# EAGLE board Reflow Control Board Rev 2 (EAGLE 6.5.0)
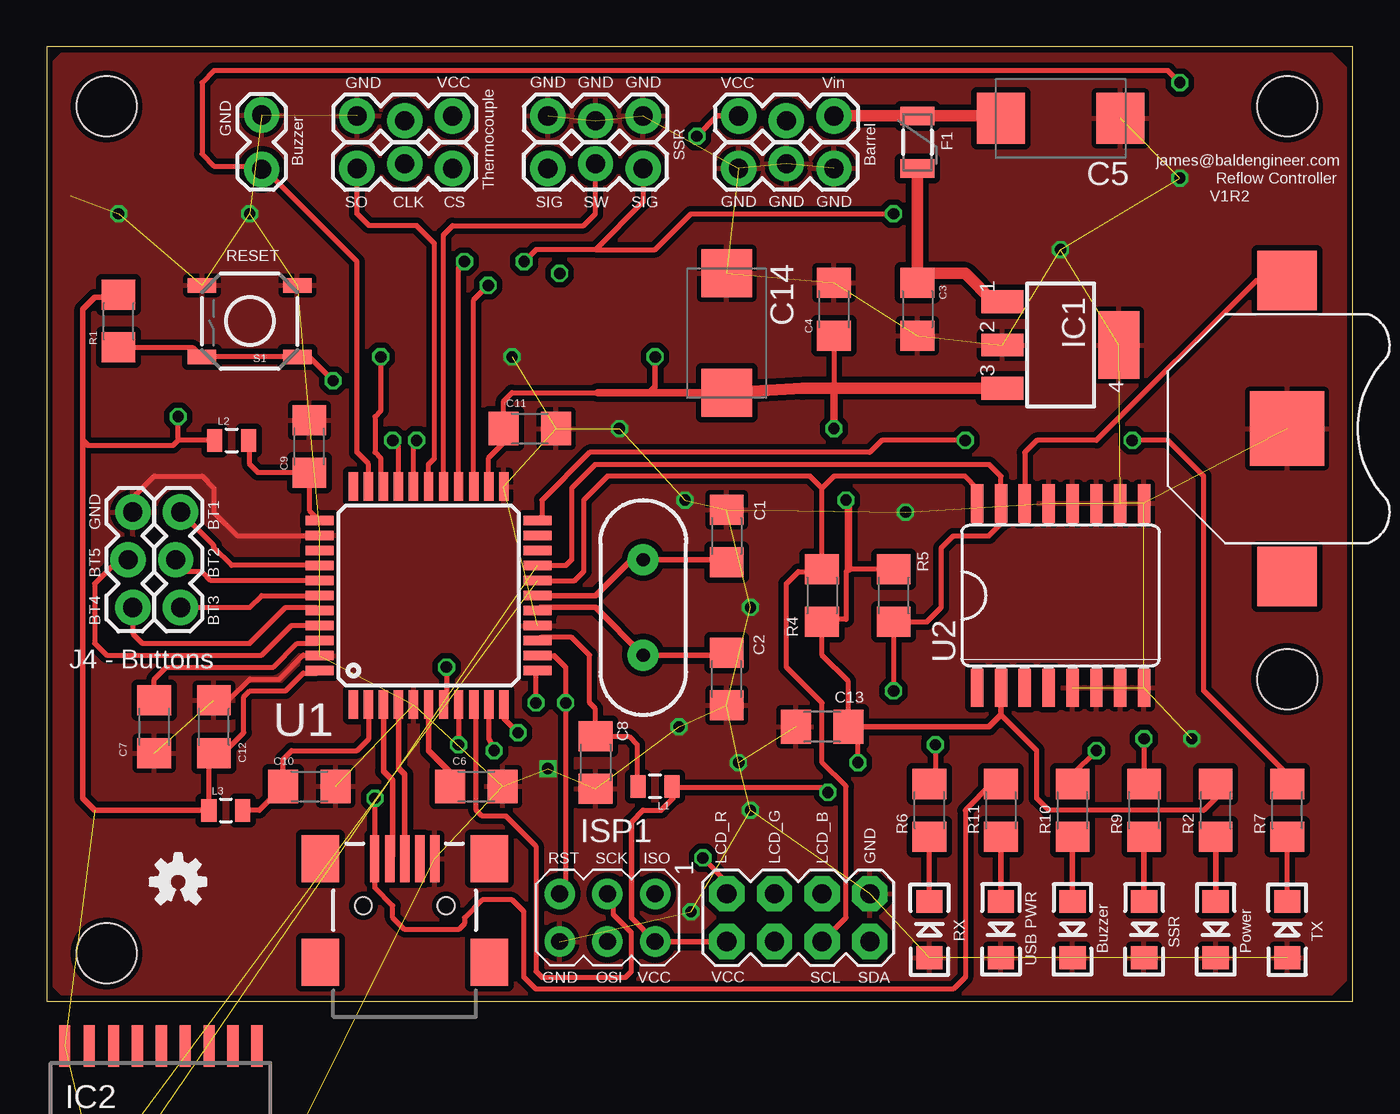
[diagram p0: board, top side]
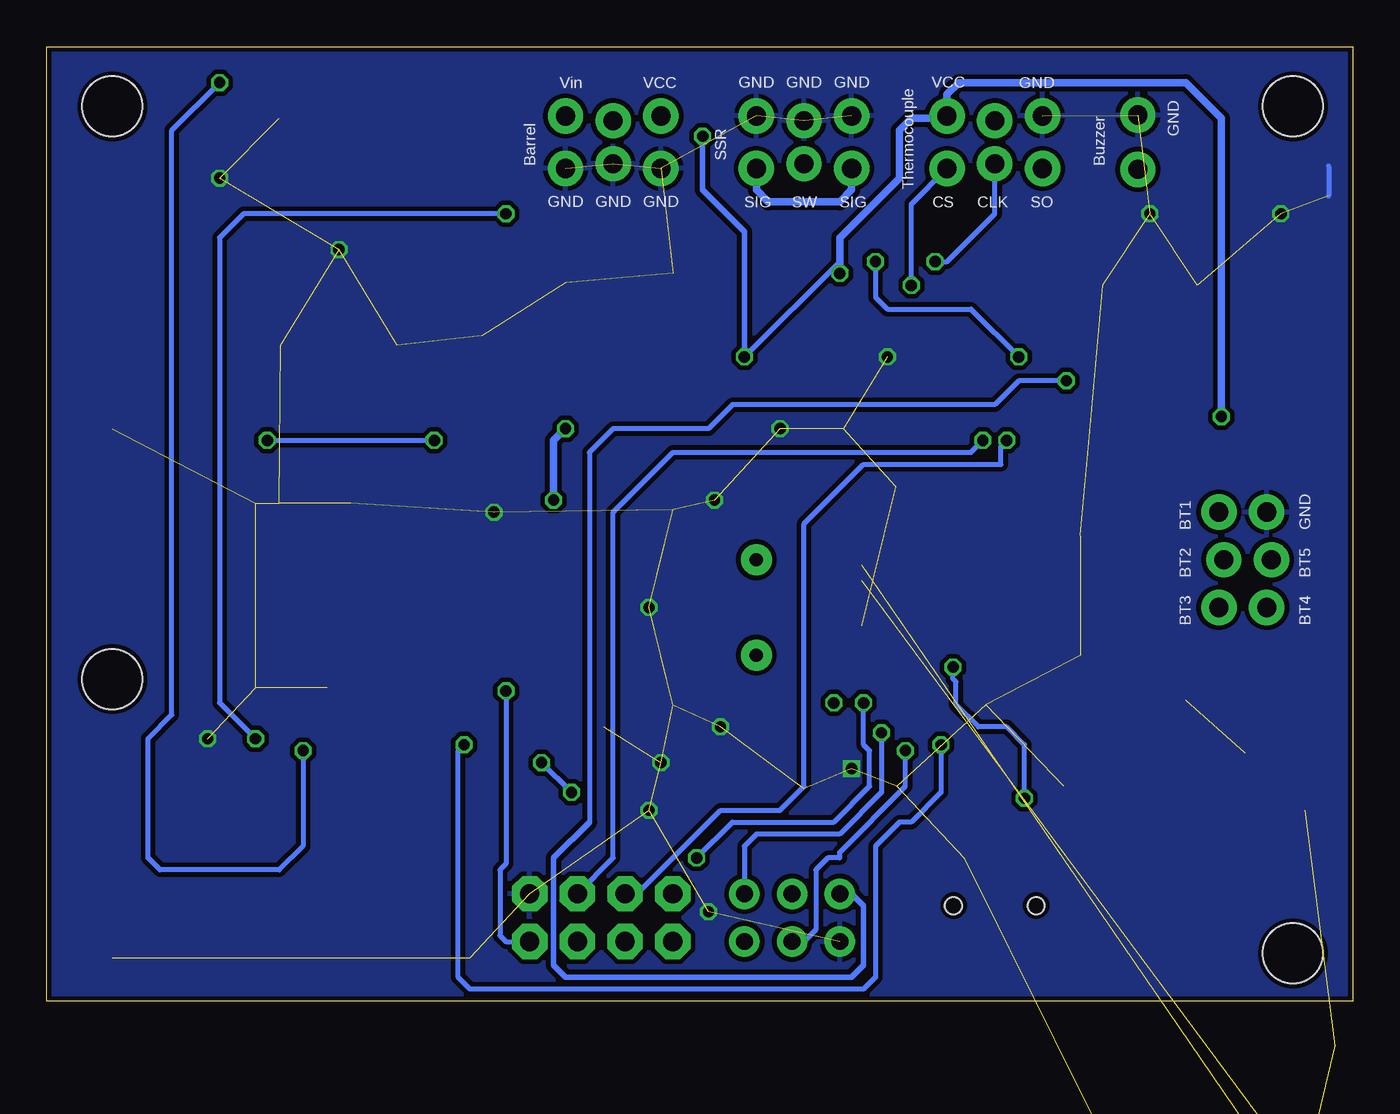
[diagram p1: board, bottom side, seen from below]

Size 69.52 x 50.79 mm. Coordinates in mm from the lower left corner, seen from the top.
Outline: 0,0 69.52,0 69.52,50.79 0,50.79 0,0
Copper layers (1*16): Top 0.035mm / dielectric 1.5mm / Bottom 0.035mm
Design rules "Fusion_eagle_rule_v1.1": minimum track width 6mil, minimum drill 12mil, track to track 6mil, track to pad 6mil, pad to pad 6mil, via to via 6mil, smd to smd 0mil, copper to edge 10mil, drill to drill 10mil, minimum pad ring 10mil, minimum via ring 6mil, stop-mask expansion 2mil, vias tented up to drill 100mil, thermal gap 10mil
Holes 3.2 mm at 3.17,47.62 3.17,2.54 66.04,17.14 66.04,47.62

## Footprints (pad centres in the part's own frame; a part is rotated, then mirrored left to right if it is on the bottom)
BATTCON_12MM = smd 3.962 x 3.962: GND 0,0 | smd 3.175 x 3.175: PWR@1 7.874,0; PWR@2 -7.874,0
LED-1206 = smd 1.2 x 1.4: A -1.5,0; C 1.5,0
1206 = smd 1.6 x 1.8: 1 -1.4,0; 2 1.4,0
D/7343-31R = smd 2.55 x 2.7: + 3.175,0; - -3.175,0
PTC-1206 = smd 1 x 1.8: 1 -1.4,0; 2 1.4,0
SOT223 = smd 1.219 x 2.235: 1 -2.311,-3.099; 2 0,-3.099; 3 2.311,-3.099 | smd 3.6 x 2.2: 4 0,3.099
SO18W = smd 0.6 x 2.2: 1 -4.445,-4.6; 2 -3.175,-4.6; 3 -1.905,-4.6; 4 -0.635,-4.6; 5 0.635,-4.6; 6 1.905,-4.6; 7 3.175,-4.6; 8 4.445,-4.6; 9 5.715,-4.6; 10 5.775,4.6; 11 4.505,4.6; 12 3.235,4.6; 13 1.965,4.6; 14 0.695,4.6; 15 -0.575,4.6; 16 -1.845,4.6; 17 -3.145,4.6; 18 -4.445,4.6
AVRISP = drill 0.9 pad 1.626: 1 -1.27,2.54; 2 1.27,2.54; 3 -1.27,0; 4 1.27,0; 5 -1.27,-2.54; 6 1.27,-2.54
1X03_LOCK = drill 1.016 pad 1.88: 1 0,0.127; 2 2.54,-0.127; 3 5.08,0.127
2X4 = drill 1.016 pad 1.88 octagon: 1 -3.81,-1.27; 2 -3.81,1.27; 3 -1.27,-1.27; 4 -1.27,1.27; 5 1.27,-1.27; 6 1.27,1.27; 7 3.81,-1.27; 8 3.81,1.27
1X02_LOCK = drill 1.016 pad 1.88: 1 -0.178,0; 2 2.718,0
0805 = smd 0.8 x 1.2: 1 -0.9,0; 2 0.9,0
TACTILE_SWITCH_SMD = smd 1.524 x 0.762: 1 -2.54,1.905; 2 2.54,1.905; 3 -2.54,-1.905; 4 2.54,-1.905
TQFP44 = smd 1.5 x 0.5: 1 -5.8,4; 2 -5.8,3.2; 3 -5.8,2.4; 4 -5.8,1.6; 5 -5.8,0.8; 6 -5.8,0; 7 -5.8,-0.8; 8 -5.8,-1.6; 9 -5.8,-2.4; 10 -5.8,-3.2; 11 -5.8,-4; 23 5.8,-4; 24 5.8,-3.2; 25 5.8,-2.4; 26 5.8,-1.6; 27 5.8,-0.8; 28 5.8,0; 29 5.8,0.8; 30 5.8,1.6; 31 5.8,2.4; 32 5.8,3.2; 33 5.8,4 | smd 0.5 x 1.5: 12 -4,-5.8; 13 -3.2,-5.8; 14 -2.4,-5.8; 15 -1.6,-5.8; 16 -0.8,-5.8; 17 0,-5.8; 18 0.8,-5.8; 19 1.6,-5.8; 20 2.4,-5.8; 21 3.2,-5.8; 22 4,-5.8; 34 4,5.8; 35 3.2,5.8; 36 2.4,5.8; 37 1.6,5.8; 38 0.8,5.8; 39 0,5.8; 40 -0.8,5.8; 41 -1.6,5.8; 42 -2.4,5.8; 43 -3.2,5.8; 44 -4,5.8
SO16L = smd 0.66 x 2.032: 1 -4.445,-4.902; 2 -3.175,-4.902; 3 -1.905,-4.902; 4 -0.635,-4.902; 5 0.635,-4.902; 6 1.905,-4.902; 7 3.175,-4.902; 8 4.445,-4.902; 9 4.445,4.902; 10 3.175,4.902; 11 1.905,4.902; 12 0.635,4.902; 13 -0.635,4.902; 14 -1.905,4.902; 15 -3.175,4.902; 16 -4.445,4.902
USB-MINIB = smd 2.5 x 0.5: D+ 2.5,0; D- 2.5,0.8; GND 2.5,-1.6; ID 2.5,-0.8; VBUS 2.5,1.6 | smd 2.5 x 2: MTN1 -3,4.5; MTN2 2.5,4.5; MTN3 -3,-4.5; MTN4 2.5,-4.5 | hole 0.9: 0,2.2; 0,-2.2
HC49US = drill 0.7 pad 1.651: 1 -2.54,0; 2 2.54,0

## Placement (x,y rotation side)
BAT1  [BATTCON_12MM]  66.04,30.48 270 top
BUZZ_IND  [LED-1206]  54.61,3.81 270 top
C1  22p  [1206]  36.2,24.77 270 top
C2  22p  [1206]  36.2,17.14 90 top
C3  0.33uF  [1206]  46.35,36.83 270 top
C4  0.1uF  [1206]  41.91,36.83 90 top
C5  47u  [D/7343-31R]  53.98,46.99 180 top
C6  1u  [1206]  22.86,11.43 0 top
C7  100n  [1206]  5.71,14.61 90 top
C8  100n  [1206]  29.21,12.7 270 top
C9  100n  [1206]  13.97,29.53 90 top
C10  100n  [1206]  13.97,11.43 0 top
C11  100n  [1206]  25.72,30.48 0 top
C12  100n  [1206]  8.89,14.61 90 top
C13  100n  [1206]  41.27,14.61 180 top
C14  10u  [D/7343-31R]  36.2,35.56 270 top
F1  PTCSMD  [PTC-1206]  46.35,45.72 270 top
IC1  UA78M05DCY  [SOT223]  53.98,34.92 270 top
IC2  MCP2300X/SO  [SO18W]  5.4,-6.99 0 top
ISP1  AVRISP-6  [AVRISP]  29.84,4.45 270 top
JP1A  [1X03_LOCK]  36.83,46.99 0 top
JP1B  [1X03_LOCK]  41.91,44.45 180 top
JP2  M04X2  [2X4]  40.01,4.45 0 top
JP3A  [1X03_LOCK]  21.59,44.45 180 top
JP3B  [1X03_LOCK]  16.51,46.99 0 top
JP4A  [1X03_LOCK]  6.99,26.04 270 top
JP4B  [1X03_LOCK]  4.45,26.04 270 top
JP5  [1X02_LOCK]  11.43,46.99 270 top
JP6A  [1X03_LOCK]  31.75,44.45 180 top
JP6B  [1X03_LOCK]  26.67,46.99 0 top
L1  [0805]  32.38,11.43 180 top
L2  [0805]  9.84,29.84 0 top
L3  [0805]  9.53,10.16 0 top
PWR_IND  [LED-1206]  62.23,3.81 270 top
R1  10k  [1206]  3.81,36.2 90 top
R2  1k  [1206]  62.23,10.16 90 top
R3  4.7k  [1206]  2.54,-14.92 0 top  (outside the outline)
R4  4k7  [1206]  41.27,21.59 270 top
R5  4k7  [1206]  45.09,21.59 90 top
R6  1k  [1206]  46.99,10.16 90 top
R7  1k  [1206]  66.04,10.16 90 top
R8  4.7k  [1206]  2.54,-17.78 0 top  (outside the outline)
R9  1k  [1206]  58.42,10.16 90 top
R10  1k  [1206]  54.61,10.16 90 top
R11  1k  [1206]  50.8,10.16 90 top
R12  [1206]  2.54,-20.64 0 top  (outside the outline)
R13  [1206]  2.54,-23.5 0 top  (outside the outline)
R14  [1206]  2.54,-26.35 0 top  (outside the outline)
R15  10k  [1206]  2.54,-29.21 0 top  (outside the outline)
RX_IND  [LED-1206]  46.99,3.81 90 top
S1  [TACTILE_SWITCH_SMD]  10.79,36.2 180 top
SSR_IND  [LED-1206]  58.42,3.81 270 top
TX_IND  [LED-1206]  66.04,3.81 90 top
U1  ATMEGA32U4-AU  [TQFP44]  20.32,21.59 90 top
U2  DS3231  [SO16L]  53.98,21.59 0 top
U$3  USB-MINIB-5PIN  [USB-MINIB]  19.05,5.08 90 top
U$4  OSHW-LOGOS  [OSHW-LOGO-S]  6.99,6.35 0 top
USB_PWR_IND  [LED-1206]  50.8,3.81 270 top
Y1  [HC49US]  31.75,20.95 90 top

## Library data of the parts
BAT1 BUZZ_IND C1-C4 C6-C13 L1-L3 PWR_IND R1-R15 RX_IND S1 SSR_IND TX_IND U2 U$4 USB_PWR_IND = Add-Ohms
C5 C14 = rcl
F1 JP1A JP1B JP2 JP3A JP3B JP4A JP4B JP5 JP6A JP6B U$3 Y1 = SparkFun
IC1 = linear
IC2 ISP1 U1 = adafruit

## Nets
A0: U1.36
BT1: JP4A.1 U1.37
BT2: JP4A.2 U1.38
BT3: JP4A.3 U1.39
BT4: JP4B.3 U1.40
BT5: JP4B.2 U1.41
BUZZ_SIG: JP5.2 R10.2 U1.32
D0: U1.20
D1: U1.21
GND: BAT1.GND BUZZ_IND.C C1.1 C2.1 C3.2 C4.2 C5.- C6.2 C7.1 C8.2 C9.2 C10.2 C11.2 C12.2 C13.2 C14.- IC1.2 IC1.4 IC2.9 ISP1.6 JP1B.1 JP1B.2 JP1B.3 JP2.8 JP3B.1 JP4B.1 JP5.1 JP6B.1 JP6B.2 JP6B.3 PWR_IND.C R12.1 R13.1 R14.1 RX_IND.A S1.3 S1.4 SSR_IND.C TX_IND.A U1.5 U1.15 U1.23 U1.35 U1.43 U2.5 U2.6 U2.7 U2.8 U2.9 U2.10 U2.11 U2.12 U2.13 U$3.GND USB_PWR_IND.C
I2C_SCL: IC2.1 JP2.5 R4.1 R8.1 U1.18 U2.16
I2C_SDA: IC2.2 JP2.7 R3.1 R5.1 U1.19 U2.15
JACK_IN: C5.+ F1.1 JP1A.3
LCD_B: JP2.6 U1.29
LCD_G: JP2.4 U1.30
LCD_R: JP2.2 U1.12
MISO: ISP1.1 U1.11
MOSI: ISP1.4 U1.10
N$1: C1.2 U1.17 Y1.2
N$2: C2.2 U1.16 Y1.1
N$3: R7.1 TX_IND.C
N$4: C6.1 U1.6
N$5: C7.2 U1.42
N$6: PWR_IND.A R2.1
N$7: R6.1 RX_IND.C
N$8: R9.1 SSR_IND.A
N$9: U1.1
N$10: U1.33
N$12: BAT1.PWR@2 U2.14
N$13: IC2.3 R12.2
N$14: BUZZ_IND.A R10.1
N$15: R11.1 USB_PWR_IND.A
N$17: IC2.4 R13.2
N$18: IC2.5 R14.2
N$20: IC2.6 R15.1
RESET: ISP1.5 R1.1 S1.1 S1.2 U1.13
RXLED: R6.2 U1.8
SCK: ISP1.3 U1.9
SSR_SIG: JP6A.1 JP6A.3 R9.2 U1.31
SSR_SW: JP6A.2 U1.27
THERM_CLK: JP3A.2 U1.26
THERM_CS: JP3A.1 U1.25
THERM_S0: JP3A.3 U1.28
TXLED: R7.2 U1.22
USB+: U1.4 U$3.D+
USB-: U1.3 U$3.D-
UVCC: C10.1 L3.2 U1.2
VCC: C4.1 C11.1 C12.1 C13.1 C14.+ IC1.3 IC2.18 ISP1.2 JP1A.1 JP2.1 JP3B.3 L1.1 L2.1 L3.1 R1.2 R2.2 R3.2 R4.2 R5.2 R8.2 R15.2 U1.24 U1.44 U2.2
VCC0: C8.1 L1.2 U1.14
VCC1: C9.1 L2.2 U1.34
VIN: C3.1 F1.2 IC1.1
VUSB: R11.2 U1.7 U$3.VBUS

## Tracks (layer width: path | path; a pad name or v marks a point on that pad's centre or on a via)
BT1
  Top 0.254: U1.37 9.83,23.19 8.89,24.13 8.89,24.26 JP4A.1
BT2
  Top 0.254: U1.38 8.72,22.39 8.26,22.86 7.49,22.86 JP4A.2
BT3
  Top 0.254: JP4A.3 10.79,20.95 11.43,21.59 U1.39
BT4
  Top 0.254: JP4B.3 4.57,19.56 5.08,19.05 10.79,19.05 12.7,20.95 14.36,20.95 U1.40
BT5
  Top 0.254: JP4B.2 3.81,23.5 2.54,22.23 2.54,19.05 3.17,18.41 11.43,18.41 13.02,20 14.51,20 U1.41
BUZZ_SIG  (via drill 0.6)
  Top 0.254: U1.32 17.12,28.6 16.51,29.21 16.51,39.37 12.06,43.81 11.89,43.81 JP5.2 11.25,44.45 8.89,44.45 8.26,45.09 8.26,48.9 8.89,49.53 59.69,49.53 v60.33,48.9 | R10.2 54.61,12.06 v55.88,13.34
  Bottom 0.254: v55.88,13.34 55.88,8.26 57.15,6.99 63.5,6.99 64.14,7.62 64.14,13.97 62.87,15.24 62.87,46.35 v60.33,48.9
GND  (via drill 0.6)  (68 unrouted)
  Top 0.254: JP4B.1 4.57,26.8 5.71,27.94 8.26,27.94 8.89,27.3 8.89,26.04 10.16,24.77 14.49,24.77 U1.35 | C12.2 9.65,16 10.79,17.14 12.38,17.14 13.65,18.41 14.49,18.41 U1.43
  Bottom 0.254: 1.27,44.45 1.27,42.86
  other vias: 3.81,41.91 10.79,41.91 60.33,43.81 53.98,40.01 45.72,26.04 60.96,13.97 24.77,34.29 37.47,20.95 33.97,26.67 33.66,14.61 36.83,12.7 30.48,30.48 37.47,10.16 34.29,4.76 26.67,12.38
  pour Bottom (isolate 0.254): 0,50.8 69.22,50.8 69.22,0 0,0
  pour Top (isolate 0.305): 1.27,50.8 67.94,50.8 69.22,49.53 69.22,1.27 67.94,0 1.27,0 0,1.27 0,49.53
I2C_SCL  (2 unrouted)
  Top 0.254: 41.27,27.3 R4.1 41.15,22.86 40.01,22.86 39.37,22.23 39.37,17.78 41.27,15.88 41.27,12.7 42.55,11.43 42.55,4.45 JP2.5 | 41.27,27.3 40.64,27.94 29.84,27.94 28.57,26.67 28.57,22.86 28.11,22.39 U1.18 | U2.16 49.53,27.3 48.9,27.94 41.91,27.94 41.27,27.3
I2C_SDA  (via drill 0.6)  (2 unrouted)
  Top 0.254: U1.19 26.13,23.18 27.62,23.18 27.94,23.5 27.94,27.3 29.21,28.57 50.16,28.57 50.8,27.94 U2.15 50.8,25.4 50.16,24.77 48.26,24.77 47.62,24.13 47.62,20.95 46.86,20.19 R5.1 | R5.1 45.09,20.32 | R5.1 v45.09,16.51
  Bottom 0.254: v45.09,16.51 45.09,7.3 45.4,6.99 45.4,3.49 45.09,3.17 JP2.7
JACK_IN
  Top 0.61: JP1A.3 F1.1 50.67,47.12 C5.+
LCD_B  (via drill 0.6)
  Top 0.254: U1.29 19.52,29.68 v19.68,29.84
  Bottom 0.254: JP2.6 39.37,7.62 39.37,26.04 36.2,29.21 20.32,29.21 v19.68,29.84
LCD_G  (via drill 0.6)
  Top 0.254: U1.30 18.72,29.54 v18.41,29.84
  Bottom 0.254: JP2.4 38.1,5.71 33.66,10.16 30.48,10.16 29.21,11.43 29.21,25.4 26.04,28.57 18.72,28.57 18.72,29.54 v18.41,29.84
LCD_R  (via drill 0.6)
  Top 0.254: JP2.2 36.2,6.35 v34.92,7.62 | v26.04,15.88 26.04,17.5 U1.12
  Bottom 0.254: v34.92,7.62 33.02,9.53 27.62,9.53 25.72,11.43 25.72,13.34 26.04,13.65 v26.04,15.88
MISO  (via drill 0.6)
  Top 0.254: U1.11 24.32,15.05 v25.08,14.29
  Bottom 0.254: v25.08,14.29 25.08,11.11 27.3,8.89 31.75,8.89 32.38,8.26 ISP1.1
MOSI  (via drill 0.6)
  Top 0.254: U1.10 23.52,13.99 v23.81,13.34
  Bottom 0.254: ISP1.4 29.21,3.17 28.57,3.81 28.57,6.99 27.94,7.62 27.3,7.62 27.3,7.94 23.81,11.43 v23.81,13.34
N$1
  Top 0.305: U1.17 29.21,21.59 31.11,23.5 Y1.2 36.06,23.5 C1.2
N$2
  Top 0.305: U1.16 26.29,20.95 29.21,20.95 Y1.1 36.06,18.41 C2.2
N$3
  Top 0.254: TX_IND.C R7.1
N$4
  Top 0.305: C6.1 21.46,12.2 20.32,13.34 U1.6
N$5
  Top 0.254: C7.2 5.71,17.14 6.35,17.78 12.06,17.78 13.34,19.05 14.38,19.05 U1.42
N$6
  Top 0.305: R2.1 PWR_IND.A
N$7
  Top 0.254: RX_IND.C R6.1
N$8
  Top 0.305: R9.1 SSR_IND.A
N$12
  Top 0.254: BAT1.PWR@2 64.39,38.35 55.88,29.84 52.7,29.84 52.07,29.21 U2.14
N$13  (1 unrouted)
N$14
  Top 0.305: R10.1 BUZZ_IND.A
N$15
  Top 0.305: R11.1 USB_PWR_IND.A
N$17  (1 unrouted)
N$18  (1 unrouted)
N$20  (1 unrouted)
RESET  (via drill 0.6)
  Top 0.254: U1.13 27.01,18.39 27.62,17.78 v27.62,15.88 27.62,6.03 ISP1.5 | R1.1 7.75,34.8 S1.2 S1.1 13.97,34.29 v15.24,33.02
  Bottom 0.254: v15.24,33.02 17.78,33.02 19.05,31.75 33.02,31.75 34.29,30.48 39.37,30.48 40.64,29.21 40.64,9.53
  Bottom 0.305: 40.64,9.53 42.55,7.62 42.55,1.91 41.91,1.27 26.67,1.27 26.04,1.91 26.04,5.08 26.67,5.71 ISP1.5
RXLED  (via drill 0.6)
  Top 0.254: U1.8 21.92,13.66 v21.91,13.65 | v47.31,13.65 47.31,11.88 R6.2
  Bottom 0.254: v21.91,13.65 21.91,11.11 23.5,9.53 24.13,9.53 25.4,8.26 25.4,1.27 26.04,0.64 46.99,0.64 47.62,1.27 47.62,13.34 v47.31,13.65
SCK
  Top 0.254: U1.9 22.86,15.65 22.86,10.16 23.18,9.84 24.45,9.84 26.04,8.26 26.04,1.59 26.35,1.27 30.8,1.27 31.11,1.59 31.11,3.65 30.16,4.6 30.16,5.4 ISP1.3
SSR_SIG  (via drill 0.6)
  Top 0.254: JP6A.1 31.75,42.55 29.21,40.01 | 29.21,40.01 26.04,40.01 v25.4,39.37 | v17.78,34.29 17.78,31.43 17.46,31.11 17.46,29.21 17.78,28.89 17.78,27.53 U1.31 | 29.21,40.01 32.38,40.01 34.29,41.91 v45.09,41.91 | v58.42,13.97 R9.2
  Bottom 0.254: v25.4,39.37 25.4,37.47 24.77,36.83 20.32,36.83 v17.78,34.29 | v45.09,41.91 59.05,41.91 60.33,40.64 60.33,15.88 v58.42,13.97
  Bottom 0.406: JP6A.3 26.67,43.18 27.3,42.55 31.11,42.55 31.75,43.18 JP6A.1
SSR_SW
  Top 0.254: U1.27 21.12,40.8 21.59,41.27 28.57,41.27 29.21,41.91 JP6A.2
THERM_CLK  (via drill 0.6)
  Top 0.254: U1.26 21.92,39.06 v22.23,39.37
  Bottom 0.254: v22.23,39.37 21.59,39.37 19.05,41.91 JP3A.2
THERM_CS  (via drill 0.6)
  Top 0.254: U1.25 22.72,37.33 v23.5,38.1
  Bottom 0.254: v23.5,38.1 23.5,42.42 JP3A.1
THERM_S0
  Top 0.254: U1.28 20.32,28.57 20.64,28.89 20.64,40.32 19.68,41.27 17.14,41.27 16.51,41.91 JP3A.3
TXLED  (via drill 0.6)
  Top 0.254: R7.2 66.04,12.06 61.59,16.51 61.59,27.94 59.69,29.84 v57.78,29.84 | v48.9,29.84 44.45,29.84 43.81,29.21 28.89,29.21 26.35,26.67 26.35,25.82 U1.22
  Bottom 0.254: v57.78,29.84 v48.9,29.84
USB+
  Top 0.305: U1.4 18.72,12.39 19.05,12.06 U$3.D+
USB-
  Top 0.305: U1.3 17.92,12.24 18.41,11.75 18.41,7.75 U$3.D-
UVCC
  Top 0.254: U1.2 17.14,15.77 17.14,13.97 16.51,13.34 13.02,13.34 12.57,12.89 C10.1 11.3,10.16 L3.2
VCC  (via drill 0.6)  (4 unrouted)
  Top 0.254: C4.1 41.91,32.61 | L3.1 8.62,12.94 C12.1 9.39,13.21 10.48,14.29 10.48,16.19 10.79,16.51 12.7,16.51 13.65,17.46 14.39,17.46 U1.44 | R5.2 42.67,22.99 42.55,22.86 42.55,20.32 41.41,20.32 R4.2 41.27,18.41 42.67,17.02 C13.1 43.18,14.1 v43.18,12.7 | R2.2 62.23,10.79 61.59,10.16 53.34,10.16 52.7,10.79 52.7,13.34 50.8,15.24 | 31.75,10.16 32.7,10.16 33.34,10.79 33.34,11.38 | 33.34,11.38 L1.1 | 33.34,11.38 41.33,11.38 v41.59,11.11 | 2.17,29.58 6.72,29.58 6.99,29.84 | 6.99,29.84 v6.99,31.11 | L2.1 6.99,29.84 | U1.24 23.5,27.41 23.5,28.89 24.32,29.71 C11.1 24.32,31.94 24.77,32.38 29.34,32.38
  Top 0.305: C13.1 50.16,14.61 50.8,15.24 U2.2 | L3.1 2.54,10.16 1.91,10.79 1.91,29.84 | 1.91,29.84 1.91,36.83 2.54,37.47 3.68,37.47 R1.2 | 2.17,29.58 1.91,29.84 | 31.75,10.16 31.11,9.53 31.11,4.45 ISP1.2 JP2.1 | JP1A.1 35.69,47.12 v34.61,46.04 | v32.38,34.29 32.38,32.7 32.07,32.38
  Top 0.406: C14.+ 32.07,32.38 29.34,32.38 | 27.43,38.6 v27.3,38.73 | 42.67,22.99 42.67,26.54 v42.55,26.67 | v41.91,30.48 41.91,32.61
  Top 0.61: IC1.3 41.91,32.61 40.23,32.61 C14.+
  Bottom 0.254: v41.59,11.11 v43.18,12.7 | 27.3,40.64 27.3,39.37 v32.38,34.29
  Bottom 0.305: v34.61,46.04 34.61,43.18 32.38,40.96 v32.38,34.29
  Bottom 0.406: v27.3,38.73 27.3,40.64 24.13,43.81 24.13,46.35 23.5,46.99 21.72,46.99 JP3B.3 | 21.59,46.99 JP3B.3 | JP3B.3 21.59,48.26 20.95,48.9 8.89,48.9 6.99,46.99 v6.99,31.11 | v42.55,26.67 42.55,29.84 v41.91,30.48
VCC0
  Top 0.254: U1.14 26.3,19.37 27.94,19.37 28.89,18.41 28.89,15.88 29.21,15.56 C8.1 30.98,14.1 31.43,13.65 31.43,11.48 L1.2
VCC1
  Top 0.254: U1.34 13.97,26.14 C9.1 11.24,28.13 10.79,28.57 10.79,29.79 L2.2
VIN
  Top 0.406: C3.1 46.35,38.73 46.99,38.73
  Top 0.61: IC1.1 50.39,37.24 48.9,38.73 46.35,38.73 F1.2
VUSB  (via drill 0.6)
  Top 0.254: v17.46,10.79 17.46,7.58 U$3.VBUS 17.46,7.57 17.46,6.03 18.41,5.08 18.41,4.45 19.05,3.81 21.91,3.81 22.23,4.13 22.23,4.45 23.18,5.4 24.77,5.4 25.4,4.76 25.4,1.27 26.04,0.64 48.26,0.64 48.9,1.27 48.9,10.16 50.3,11.56 R11.2 | v21.27,17.78 21.27,15.94 U1.7
  Bottom 0.254: v17.46,10.79 17.46,13.65 18.41,14.61 19.93,14.61 U1.7 21.12,16.99 21.27,17.14 v21.27,17.78

## Text on the board
tNames: GND | VCC | GND | GND | GND | VCC | Vin | GND | SSR | Buzzer | Barrel | james@baldengineer.com | Thermocouple | GND | GND | GND | V1R2 | Reflow Controller | SO | CLK | CS | SIG | SW | SIG | RESET | BT1 | GND | BT2 | BT5 | BT3 | BT4 | J4 - Buttons | RST | SCK | ISO | LCD_R | LCD_G | LCD_B | GND | RX | Buzzer | SSR | Power | TX | VCC | USB PWR | GND | OSI | VCC | SCL | SDA
bNames: GND | VCC | Thermocouple | GND | GND | GND | VCC | Vin | GND | SSR | Buzzer | Barrel | GND | GND | GND | SO | CLK | CS | SIG | SW | SIG | BT1 | GND | BT2 | BT5 | BT3 | BT4